# EAGLE board T09_LockBox-PCBLayout_ver4.sch (EAGLE 7.7.0)
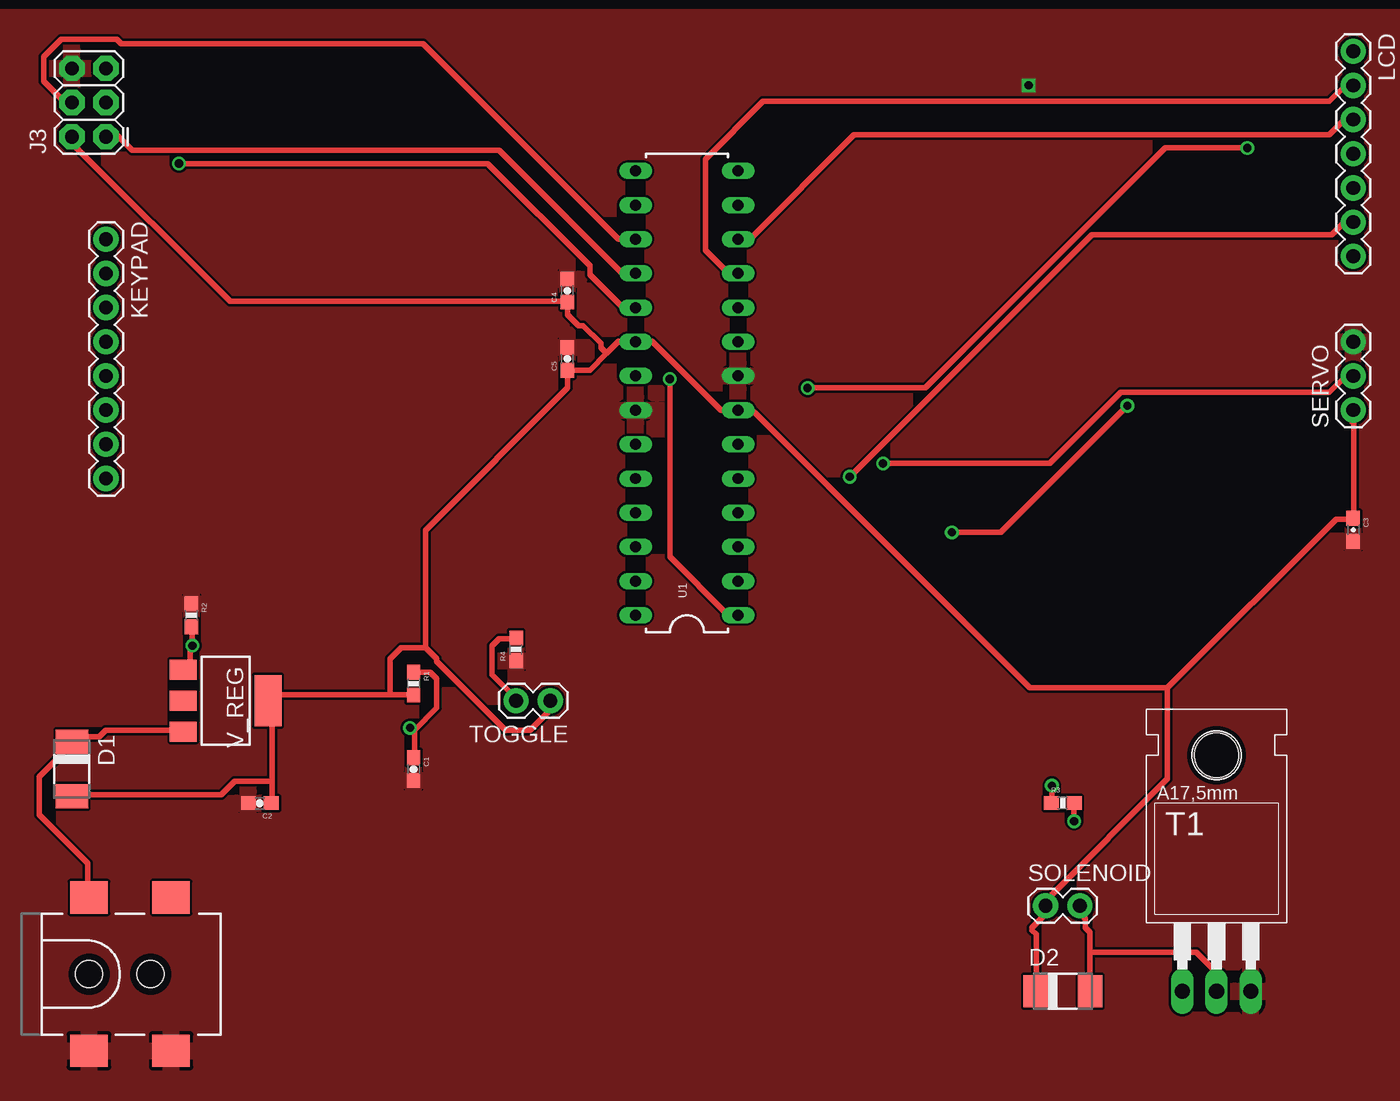
[diagram p0: board, top side]
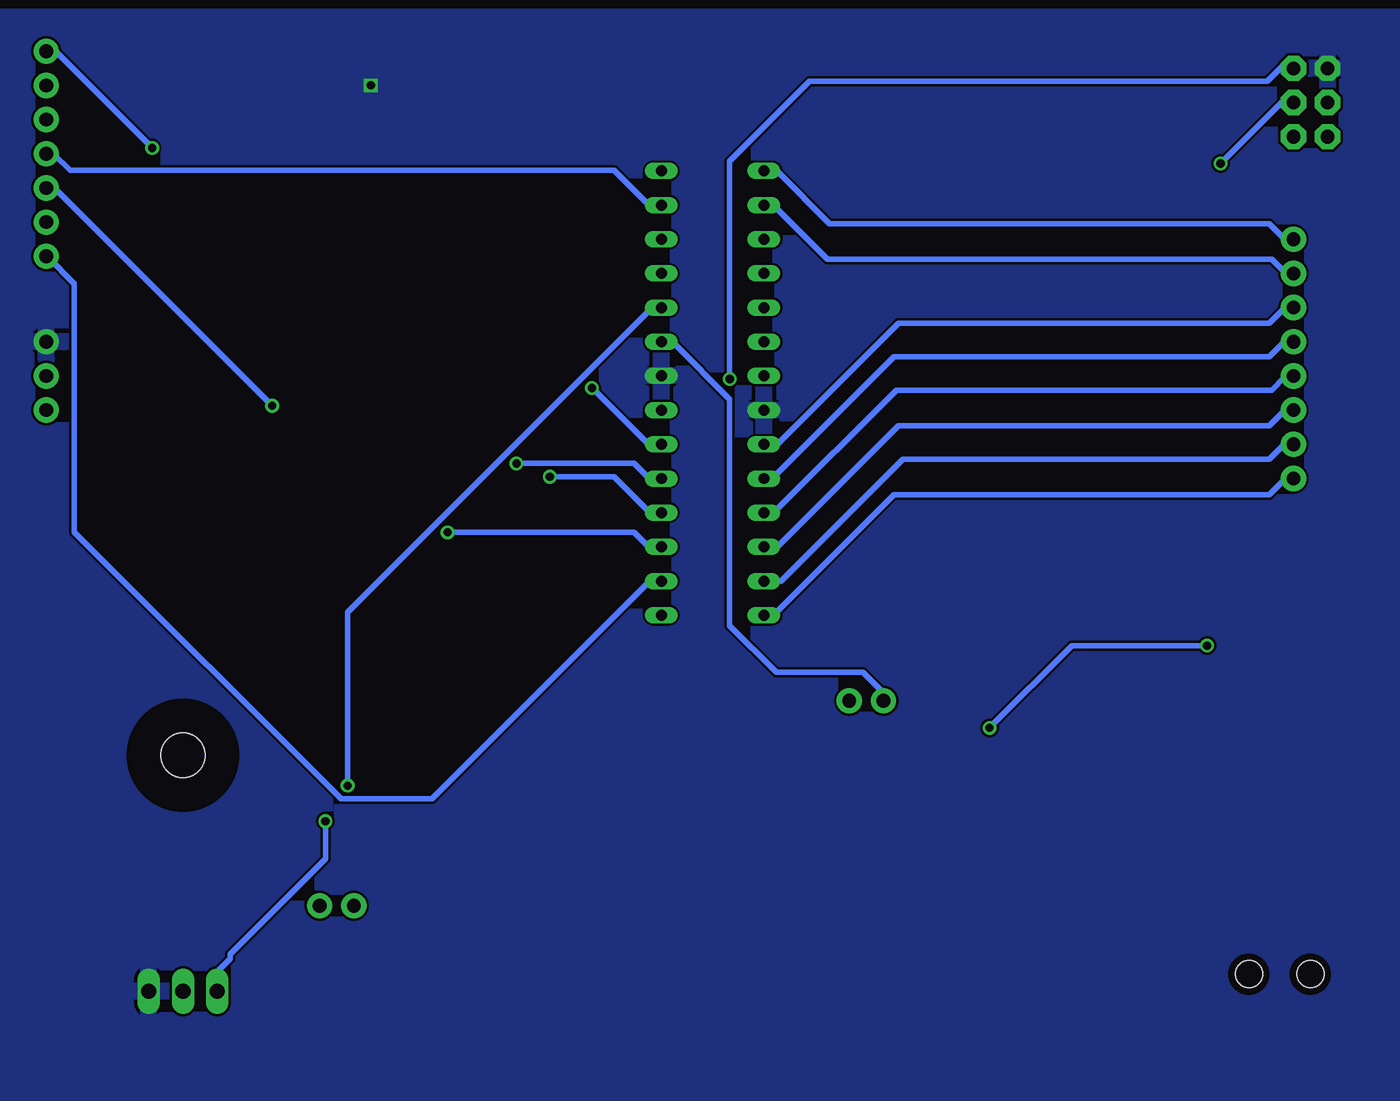
[diagram p1: board, bottom side, seen from below]

No outline drawn. Coordinates in mm, seen from the top.
Copper layers (1*16): Top 0.0178mm / dielectric 59mil / Bottom 0.0178mm
Design rules "RULE": minimum track width 7mil, minimum drill 16mil, track to track 7mil, track to pad 7mil, pad to pad 7mil, via to via 7mil, smd to smd 7mil, copper to edge 20mil, drill to drill 16mil, minimum pad ring 8mil, minimum via ring 8mil, stop-mask expansion 3mil, vias tented up to drill 0mil, thermal gap 10mil
Net classes: 0 default: width 0.406 mm, drill 0.508 mm, clearance 0.254 mm; 1 Ground: width 0.61 mm

## Footprints (pad centres in the part's own frame; a part is rotated, then mirrored left to right if it is on the bottom)
0603-CAP = smd 1.1 x 1: 1 -0.85,0; 2 0.85,0
DO-214AC = smd 1.8 x 2.4: A 2.025,0; C -2.025,0
POWER_JACK_SMD = smd 2.8 x 2.4: GND 0,-5.7; P$4 6.1,-5.7; VIN0 0,5.7; VIN1 6.1,5.7 | hole 2.032: 0,0; 4.572,0
2X3 = drill 1.016 pad 1.88 octagon: 1 0,0; 2 0,2.54; 3 2.54,0; 4 2.54,2.54; 5 5.08,0; 6 5.08,2.54
1X08_ROUND = drill 1.016 pad 1.88: 1 0,0; 2 2.54,0; 3 5.08,0; 4 7.62,0; 5 10.16,0; 6 12.7,0; 7 15.24,0; 8 17.78,0
1X07 = drill 1.016 pad 1.88: 1 0,0; 2 2.54,0; 3 5.08,0; 4 7.62,0; 5 10.16,0; 6 12.7,0; 7 15.24,0
0603-RES = smd 1.1 x 1: 1 -0.85,0; 2 0.85,0
1X03 = drill 1.016 pad 1.88: 1 0,0; 2 2.54,0; 3 5.08,0
1X02 = drill 1.016 pad 1.88: 1 0,0; 2 2.54,0
TO220 = drill 1.118 long: 1 -2.54,-6.35; 2 0,-6.35; 3 2.54,-6.35 | hole 3.302: 0,11.176
DIL28-3 = drill 0.813 long: 1 -16.51,-3.81; 2 -13.97,-3.81; 3 -11.43,-3.81; 4 -8.89,-3.81; 5 -6.35,-3.81; 6 -3.81,-3.81; 7 -1.27,-3.81; 8 1.27,-3.81; 9 3.81,-3.81; 10 6.35,-3.81; 11 8.89,-3.81; 12 11.43,-3.81; 13 13.97,-3.81; 14 16.51,-3.81; 15 16.51,3.81; 16 13.97,3.81; 17 11.43,3.81; 18 8.89,3.81; 19 6.35,3.81; 20 3.81,3.81; 21 1.27,3.81; 22 -1.27,3.81; 23 -3.81,3.81; 24 -6.35,3.81; 25 -8.89,3.81; 26 -11.43,3.81; 27 -13.97,3.81; 28 -16.51,3.81
SOT223 = smd 1.5 x 2: 1 -2.3,-3.15; 2 0,-3.15; 3 2.3,-3.15 | smd 3.8 x 2: 4 0,3.15

## Placement (x,y rotation side)
C1  10uF  [0603-CAP]  30.48,22.86 270 top
C2  220uF  [0603-CAP]  19.05,20.32 180 top
C3  470uF  [0603-CAP]  100.33,40.64 270 top
C4  220uF  [0603-CAP]  41.91,58.42 90 top
C5  220uF  [0603-CAP]  41.91,53.34 90 top
D1  1N4004DO-214AC  [DO-214AC]  5.08,22.86 270 top
D2  1N4004DO-214AC  [DO-214AC]  78.74,6.35 0 top
J1  5.5x2.1mm Barrel  [POWER_JACK_SMD]  6.35,7.62 0 top
J3  FEMALE 2x3  [2X3]  7.62,69.85 90 top
KEYPAD  8-Pins  [1X08_ROUND]  7.62,62.23 270 top
LCD  7-Pins  [1X07]  100.33,76.2 270 top
R1  120  [0603-RES]  30.48,29.21 270 top
R2  360  [0603-RES]  13.97,34.29 270 top
R3  2k2  [0603-RES]  78.74,20.32 0 top
R4  1k  [0603-RES]  38.1,31.75 90 top
SERVO  3-Pins  [1X03]  100.33,49.53 90 top
SOLENOID  2-Pins  [1X02]  77.47,12.7 0 top
T1  TIP31  [TO220]  90.17,12.7 0 top
TOGGLE  2-Pins  [1X02]  40.64,27.94 180 top
U1  ATMEGA328P_PDIP  [DIL28-3]  50.8,50.8 90 top
V_REG  LD117AS12TR  [SOT223]  16.51,27.94 270 top

## Library data of the parts
C1 C2 C4 C5 = SparkFun-Passives
C3 = SparkFun-Capacitors
D1 D2 = diode
J1 = SparkFun-Connectors; PROD_ID: CONN-08106; SF_ID: PRT-12748
J3 = SparkFun-Connectors; PROD_ID: CONN-11566
KEYPAD = SparkFun-Connectors; PROD_ID: CONN-08437
LCD SERVO SOLENOID TOGGLE = SparkFun-Connectors
R1-R4 = SparkFun-Resistors
T1 = transistor
U1 = SparkFun-DigitalIC
V_REG = v-reg

## Nets
DATA1: LCD.1 U1.6
DATA2: LCD.2 U1.11
DATA3: LCD.3 U1.12
DATA4: LCD.4 U1.13
EN: LCD.7 U1.2
GND [Ground]: C1.2 C2.2 C3.2 C4.2 C5.2 J1.GND J1.P$4 J3.6 R2.1 R4.1 SERVO.3 T1.3 U1.8 U1.22
KEY1: KEYPAD.1 U1.15
KEY2: KEYPAD.2 U1.16
KEY3: KEYPAD.3 U1.23
KEY4: KEYPAD.4 U1.24
KEY5: KEYPAD.5 U1.25
KEY6: KEYPAD.6 U1.26
KEY7: KEYPAD.7 U1.27
KEY8: KEYPAD.8 U1.28
MISO: J3.1 U1.18
MOSI: J3.4 U1.17
MOTOR: SERVO.2 U1.5
N$2: R3.2 T1.1
N$14: C1.1 R1.1 R2.2 V_REG.1
RESET: J3.5 U1.1
RS: LCD.6 U1.4
SCK: J3.3 U1.19
SOLENOID: R3.1 U1.10
SOLENOID-: D2.A SOLENOID.2 T1.2
SWITCH: R4.2 TOGGLE.2 U1.9
VCC: C2.1 C3.1 C4.1 C5.1 D1.A D2.C J3.2 R1.2 SERVO.1 SOLENOID.1 TOGGLE.1 U1.7 U1.20 V_REG.4
VIN: D1.C J1.VIN0 V_REG.3
W/R: LCD.5 U1.3

## Tracks (layer width: path | path; a pad name or v marks a point on that pad's centre or on a via)
DATA1  (via drill 0.61)
  Top 0.406: v59.77,51.18 68.52,51.18 86.35,69.01 v92.46,69.01
  Bottom 0.406: v59.77,51.18 55.64,47.05 54.65,47.05 U1.6 | v92.46,69.01 99.56,76.11 100.22,76.11 LCD.1
DATA2
  Top 0.406: U1.11 54.48,59.77 53.82,59.77 52.17,61.42 52.17,68.19 56.46,72.48 98.56,72.48 99.72,73.64 100.22,73.64 LCD.2
DATA3
  Top 0.406: U1.12 54.65,62.24 55.47,62.24 63.23,70 98.56,70 99.56,70.99 100.22,70.99 LCD.3
DATA4
  Bottom 0.406: U1.13 54.65,64.88 55.64,64.88 58.12,67.36 98.56,67.36 99.72,68.52 100.22,68.52 LCD.4
EN
  Bottom 0.406: U1.2 54.65,36.82 55.47,36.82 71.65,20.64 78.42,20.64 98.23,40.45 98.23,58.94 100.22,60.92 LCD.7
GND  (via drill 0.6)
  other vias: 76.2,73.66
  pour Top: -1.27,78.74 107.95,78.74 107.95,-1.27 -1.27,-1.27
  pour Bottom: -1.27,78.74 107.95,78.74 107.95,-1.27 -1.27,-1.27
KEY1
  Bottom 0.406: U1.15 46.89,67.2 45.9,67.2 42.1,63.4 9.41,63.4 8.26,62.24 7.76,62.24 KEYPAD.1
KEY2
  Bottom 0.406: U1.16 46.89,64.72 46.23,64.72 42.27,60.76 9.25,60.76 8.26,59.77 7.76,59.77 KEYPAD.2
KEY3
  Bottom 0.406: U1.23 46.89,47.05 45.9,47.05 36.98,55.97 9.41,55.97 8.26,57.12 7.76,57.12 KEYPAD.3
KEY4
  Bottom 0.406: U1.24 46.89,44.58 46.23,44.58 37.31,53.49 9.41,53.49 8.42,54.48 7.76,54.48 KEYPAD.4
KEY5
  Bottom 0.406: U1.25 46.89,41.94 46.23,41.94 37.15,51.02 9.25,51.02 8.26,52.01 7.76,52.01 KEYPAD.5
KEY6
  Bottom 0.406: KEYPAD.6 8.26,49.53 9.41,48.37 36.98,48.37 45.9,39.46 46.89,39.46 U1.26
KEY7
  Bottom 0.406: U1.27 46.89,36.82 45.73,36.82 36.65,45.9 9.41,45.9 8.42,46.89 7.76,46.89 KEYPAD.7
KEY8
  Bottom 0.406: U1.28 46.89,34.34 46.23,34.34 37.31,43.26 9.41,43.26 8.26,44.41 7.76,44.41 KEYPAD.8
MISO
  Top 0.406: U1.18 46.89,59.77 45.9,59.77 36.82,68.85 9.58,68.85 8.42,70 7.76,70 J3.1
MOSI
  Top 0.406: U1.17 46.89,62.24 45.73,62.24 31.2,76.77 8.75,76.77 8.42,77.1 4.29,77.1 2.97,75.78 2.97,73.97 4.46,72.48 4.95,72.48 J3.4
MOTOR  (via drill 0.61)
  Top 0.406: v65.38,45.57 77.76,45.57 83.05,50.85 98.56,50.85 99.72,52.01 100.22,52.01 SERVO.2
  Bottom 0.406: v65.38,45.57 56.63,45.57 55.64,44.58 54.65,44.58 U1.5
N$2  (via drill 0.61)
  Top 0.406: v79.58,18.99 79.58,20.31 R3.2
  Bottom 0.406: v79.58,18.99 79.58,16.18 86.68,9.08 86.68,8.75 87.5,7.92 87.5,6.44 T1.1
N$14  (via drill 0.61)
  Top 0.406: R2.2 14.03,33.35 v14.03,32.03 13.87,31.86 13.87,30.87 13.37,30.38 V_REG.1 | 30.54,25.76 30.54,23.77 C1.1 | 30.54,25.76 32.19,27.41 32.19,29.55 31.7,30.05 30.54,30.05 R1.1 | v30.21,25.92 30.38,25.76 30.54,25.76
  Bottom 0.406: v14.03,32.03 24.11,32.03 v30.21,25.92
RESET  (via drill 0.61)
  Top 0.406: v49.53,51.84 49.53,38.63 53.82,34.34 54.48,34.34 U1.1
  Bottom 0.406: v49.53,51.84 49.53,68.02 43.59,73.97 9.58,73.97 8.42,75.12 7.92,75.12 7.76,74.95 J3.5
RS  (via drill 0.61)
  Top 0.406: v62.9,44.58 80.9,62.57 98.73,62.57 99.56,63.4 100.22,63.4 LCD.6
  Bottom 0.406: v62.9,44.58 58.12,44.58 55.47,41.94 54.65,41.94 U1.4
SCK  (via drill 0.61)
  Top 0.406: v13.04,67.86 35.99,67.86 43.59,60.26 43.59,59.6 45.9,57.29 46.89,57.29 U1.19
  Bottom 0.406: v13.04,67.86 8.42,72.48 7.76,72.48 J3.3
SOLENOID  (via drill 0.61)
  Top 0.406: v77.93,21.63 77.93,20.47 R3.1
  Bottom 0.406: v77.93,21.63 77.93,34.51 55.31,57.12 54.65,57.12 U1.10
SOLENOID-
  Top 0.406: 80.73,9.25 80.73,10.73 80.4,11.06 80.4,11.72 80.07,12.05 80.07,12.55 SOLENOID.2 | 80.73,9.25 80.73,6.44 D2.A | 80.73,9.25 88.66,9.25 90.14,7.76 90.14,6.44 T1.2
SWITCH
  Top 0.406: R4.2 37.97,32.52 36.82,32.52 36.32,32.03 36.32,29.88 38.14,28.07 TOGGLE.2
  Bottom 0.406: U1.9 54.48,54.48 53.66,54.48 49.53,50.35 49.53,33.52 46.06,30.05 39.62,30.05 38.14,28.56 38.14,28.07 TOGGLE.2
VCC
  Top 0.406: D2.C 76.77,6.44 76.77,10.57 76.44,10.9 76.44,11.06 77.43,12.05 77.43,12.55 SOLENOID.1 77.43,12.88 77.76,13.21 77.76,13.37 86.51,22.12 86.51,28.89 | SERVO.1 100.22,49.53 100.22,48.7 100.38,48.54 100.38,41.6 C3.1 100.22,41.44 99.06,41.44 86.51,28.89 | 19.98,21.96 19.98,27.74 19.81,27.9 V_REG.4 19.98,27.9 20.47,28.4 28.73,28.4 | 19.98,21.96 19.98,20.47 C2.1 | 28.73,28.4 30.38,28.4 R1.2 | 19.98,21.96 17.17,21.96 16.18,20.97 5.12,20.97 D1.A | 31.37,31.86 32.19,31.04 32.19,30.87 37.31,25.76 39.13,25.76 40.62,27.24 40.62,27.9 TOGGLE.1 | 31.37,31.86 29.55,31.86 28.73,31.04 28.73,28.4 | 44.83,53.74 45.73,54.65 46.89,54.65 U1.20 47.05,54.65 48.21,54.65 53.33,49.53 U1.7 54.65,49.37 55.8,49.37 76.28,28.89 86.51,28.89 | 44.83,53.74 43.59,52.5 41.94,52.5 C5.1 41.94,52.34 41.94,51.18 31.37,40.62 31.37,31.86 | 44.83,53.74 44.41,54.15 44.41,54.48 43.09,55.8 42.76,55.8 41.94,56.63 41.94,57.45 C4.1 41.77,57.62 16.84,57.62 5.12,69.34 5.12,69.84 J3.2
VIN
  Top 0.406: V_REG.3 13.21,25.76 7.59,25.76 7.1,25.26 5.45,25.26 5.12,24.93 D1.C 5.12,24.77 2.64,22.29 2.64,19.48 6.27,15.85 6.27,13.37 J1.VIN0
W/R  (via drill 0.61)
  Top 0.406: v70.5,40.45 74.13,40.45 v83.54,49.86
  Bottom 0.406: v70.5,40.45 56.63,40.45 55.64,39.46 54.65,39.46 U1.3 | v83.54,49.86 99.72,66.04 LCD.5